# Altium PCB Task1.PcbDoc
Units mm, origin at the board's own origin, x right, y up, seen from the top; angles counter-clockwise.
Board outline 20 x 20 mm, 2 copper layers (Top Layer, Bottom Layer), stack 1.65 mm thick; 4 components, 4 nets, 11 pads, 0 vias.
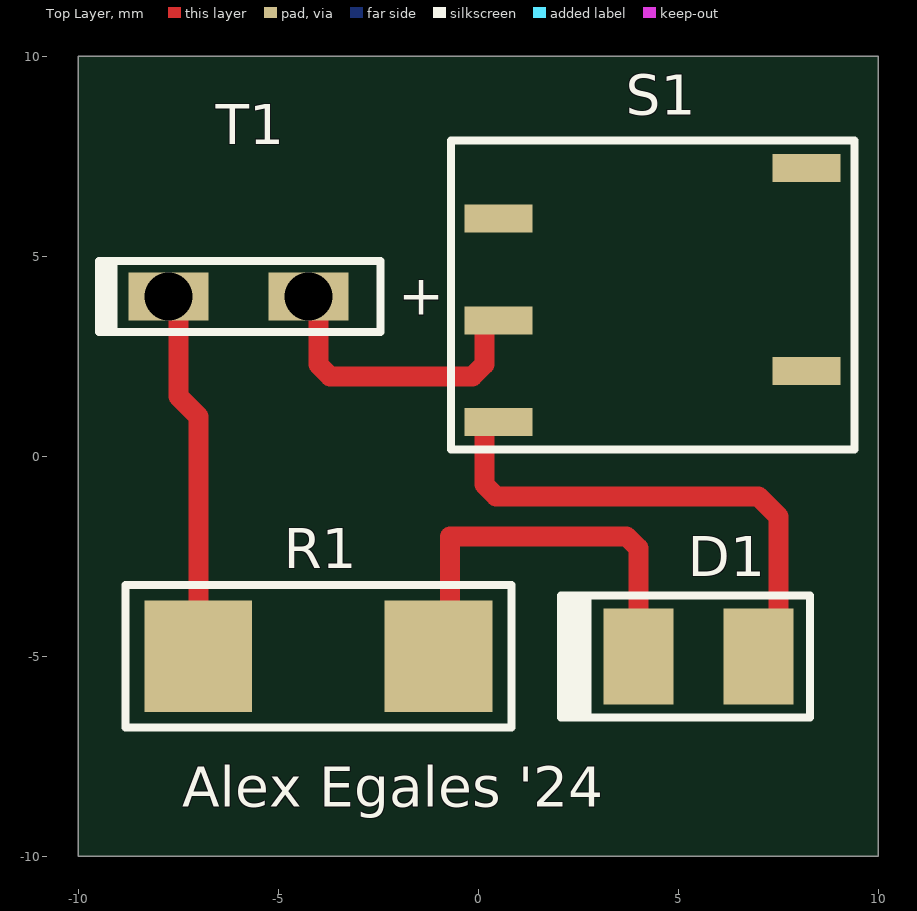
[diagram p0: Top Layer view]
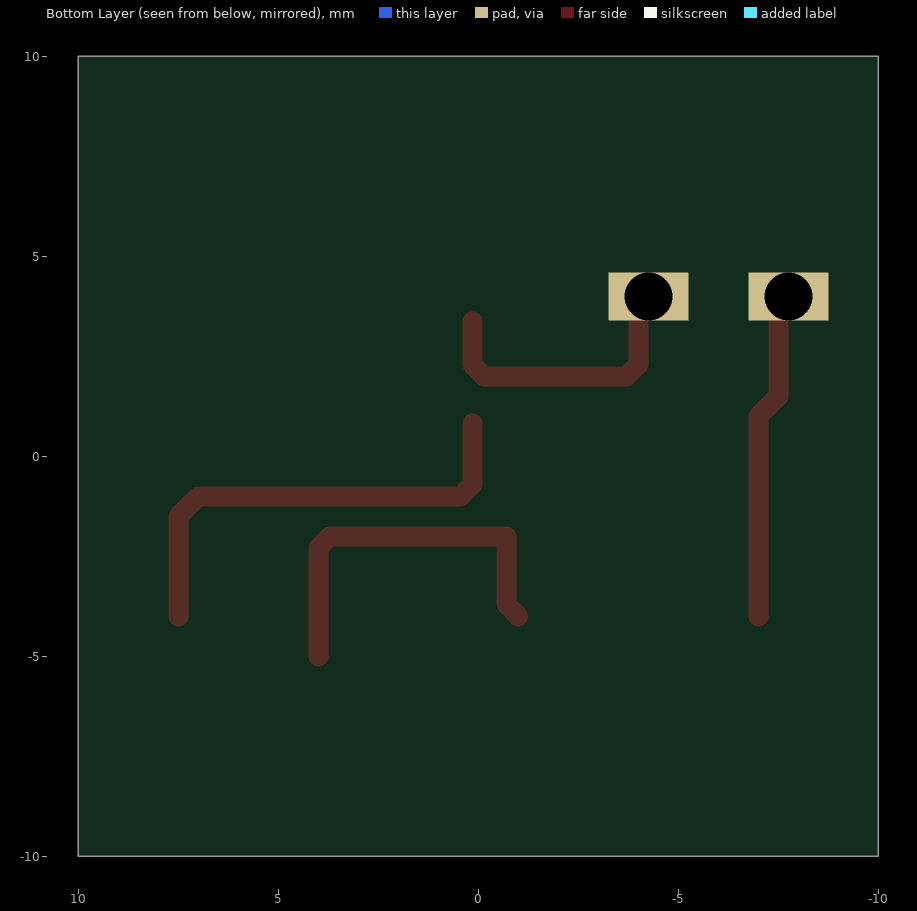
[diagram p1: Bottom Layer view, seen from below]
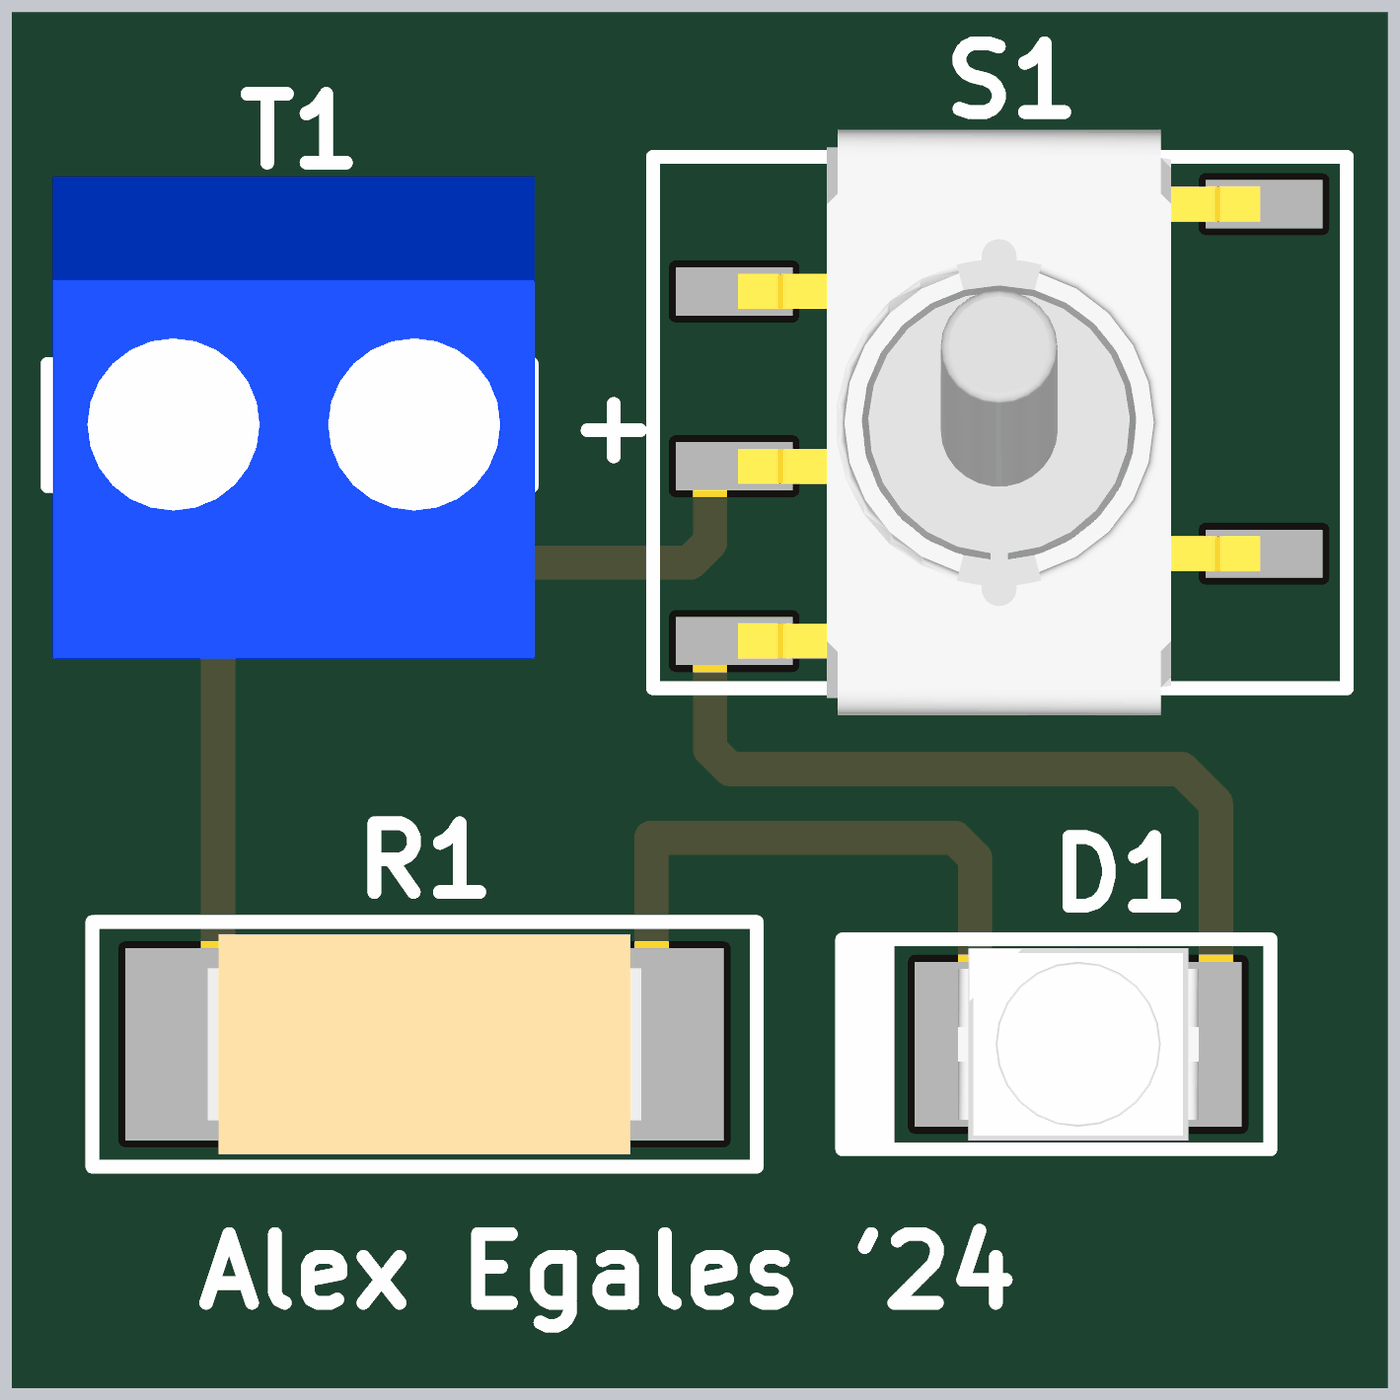
[diagram p2: 3D render of the assembled board from above, using the file's embedded part models]

## Layer stack, top to bottom
Top Solder: solder mask 0.025, Solder Resist, Dk 3.5
Top Layer: signal copper 0.025
Dielectric 1: dielectric 1.6, FR-4, Dk 4.8
Bottom Layer: signal copper 0.025
Bottom Solder: solder mask 0.025, Solder Resist, Dk 3.5

## Board outline
-10,-10 10,-10 10,10 -10,10

## Design rules (kind name [scope] priority, off if disabled: settings)
Clearance [All] p1: gap=0.3 ignorepadtopadclearanceinfootprint=FALSE
PolygonConnect [All] p1: connectstyle=Relief reliefconductorwidth=0.254 reliefentries=4 polygonreliefangle="90 Angle" airgapwidth=0.254
RoutingVias [All] p1: holewidth=0.3 width=0.6 viastyle="Through Hole" minholewidth=0.3 minwidth=0.6 maxholewidth=0.3 maxwidth=0.6
SolderMaskExpansion [All] p1: expansion=0.102 istentingtop=FALSE
Width [All] p1: maxlimit=1 minlimit=0.3 preferedwidth=0.5
30 further rules are at their usual default settings.

## Components (designator, comment, footprint, x,y, rotation, side; value= is the part's Value field where it differs from the comment)
D1 "Comment" LED 5.5,-5 r0 top
R1 "Comment" Resistor -4,-5 r180 top
S1 "Comment" Switch 4.35,4.035 r0 top
T1 "Comment" Terminal -6,4 r0 top

## Footprints (in the part's own frame and the unit in brackets; to place one, negate y for a bottom-side part, rotate by r counter-clockwise, add the part's x,y. Pads: shape width x height; smd on the part's side, far side on the other; paste and mask are expansions set on the pad)
LED [mm]
  rect 1.75x2.4 smd: 1(-1.5,0) 2(1.5,0)
  silkscreen extent -3.43,-1.52 2.79,1.52, body extent -1.75,-1.4 1.75,1.4, height 1.91
Resistor [mm]
  rect 2.69x2.79 smd: 1(-3.005,0) 2(3.005,0)
  silkscreen extent -4.83,-1.78 4.83,1.78, body extent -3.15,-1.6 3.15,1.6, height 2.49
Switch [mm]
  rect 1.7x0.7 smd: 1(-3.85,-0.635) 2(-3.85,-3.175) 3(-3.85,1.905) S1(3.85,3.175) S2(3.85,-1.905)
  silkscreen extent -5.03,-3.86 5.05,3.86, body extent -3.8,-4.25 3.8,4.25, height 12.96
Terminal [mm]
  rect 2x1.2 hole 1.2: 1(-1.75,0) 2(1.75,0)
  silkscreen extent -3.48,-0.91 3.56,0.89, body extent -3.4,-3.39 3.6,3.61, height 8.4

## Part data
D1: library part LED, "LED GREEN CLEAR 3528 SMD", Part Number=732-4997-1-ND, ComponentLink1Description=DigiKey, ComponentLink1URL=https://www.digikey.com/en/products/detail/w%C3%BCrth-elektronik/150141GS73100/4489957
R1: library part Resistor, "RES SMD 230OHM 0.01% 1/4W J LEAD", Part Number=Y1121230R000T9L-ND, ComponentLink1Description=DigiKey, ComponentLink1URL=https://www.digikey.com/en/products/detail/vpg-foil-resistors/Y1121230R000T9L/4225988
S1: library part Switch, "SWITCH TOGGLE SPDT 0.4VA 28V", ComponentLink1Description=DigiKey, ComponentLink1URL=https://www.digikey.com/en/products/detail/nkk-switches/G3T12AP/1006855, Part Key=360-1774-ND
T1: library part Terminal, "Screw Terminals 3.5mm Pitch (2-Pin)", Part Number="PRT-08084 RoHS", ComponentLink1Description=SparkFun, ComponentLink1URL=https://www.sparkfun.com/products/8084

## Nets (pads, with @x,y where several pads share a name; then routed paths per layer and width w, separated by ;. In a path a pad name is that pad's centre, name@x,y a point inside that pad or via, vN(x,y) a via of type N, cw(c..) or ccw(c..) an arc to the next point about the centre after c; other vN are vias at no path point)
+3V3: S1.1 T1.2 | length 7.2
  Top Layer w0.5: T1.2@-4,4 -4,2.293 -3.707,2 -0.143,2 0.15,2.293 S1.1@0.15,3.365
GND: R1.2 T1.1 | length 8.2
  Top Layer w0.5: T1.1@-7.5,4 -7.5,1.5 -7,1 -7,-3.995 R1.2@-7.005,-4
NetDesignator4_1: D1.1 R1.1 | length 9.7
  Top Layer w0.5: R1.1@-0.995,-4 -0.702,-3.707 -0.702,-2 3.707,-2 4,-2.293 D1.1
NetDesignator4_2: D1.2 S1.2 | length 11.7
  Top Layer w0.5: S1.2@0.15,0.825 0.15,-0.707 0.443,-1 7,-1 7.5,-1.5 D1.2@7.5,-4
pads on no net: S1.3 S1.S1 S1.S2

## Silkscreen, mask and mechanical layers (free items; w line width, h text height)
Top Overlay:
  text "+" at -2,3.533 h1
  text "Alex Egales '24" at -7.4,-8.767 h1